# Altium PCB Remote_PCB.PcbDoc
Units mil, origin at the board's own origin, x right, y up, seen from the top; angles counter-clockwise.
Board outline 1045 x 1580 mil, 2 copper layers (Top Layer, Bottom Layer); 11 components, 10 nets, 40 pads, 0 vias.
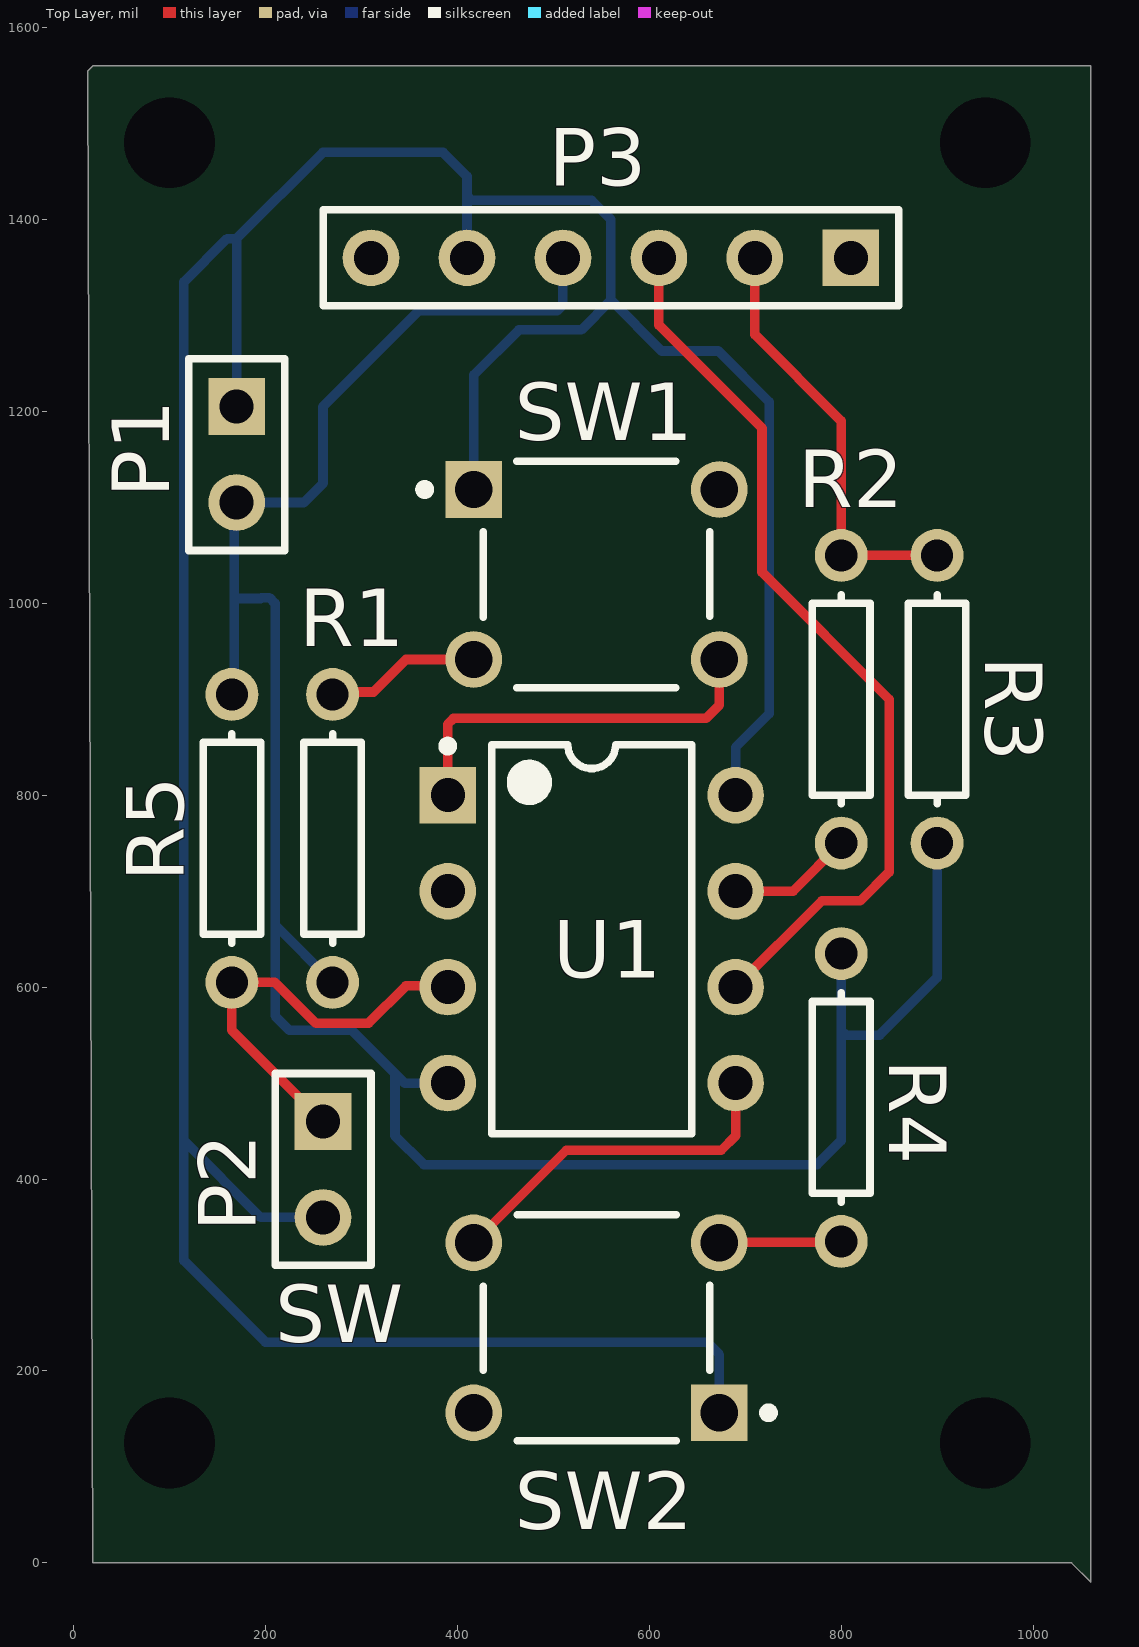
[diagram p0: Top Layer view]
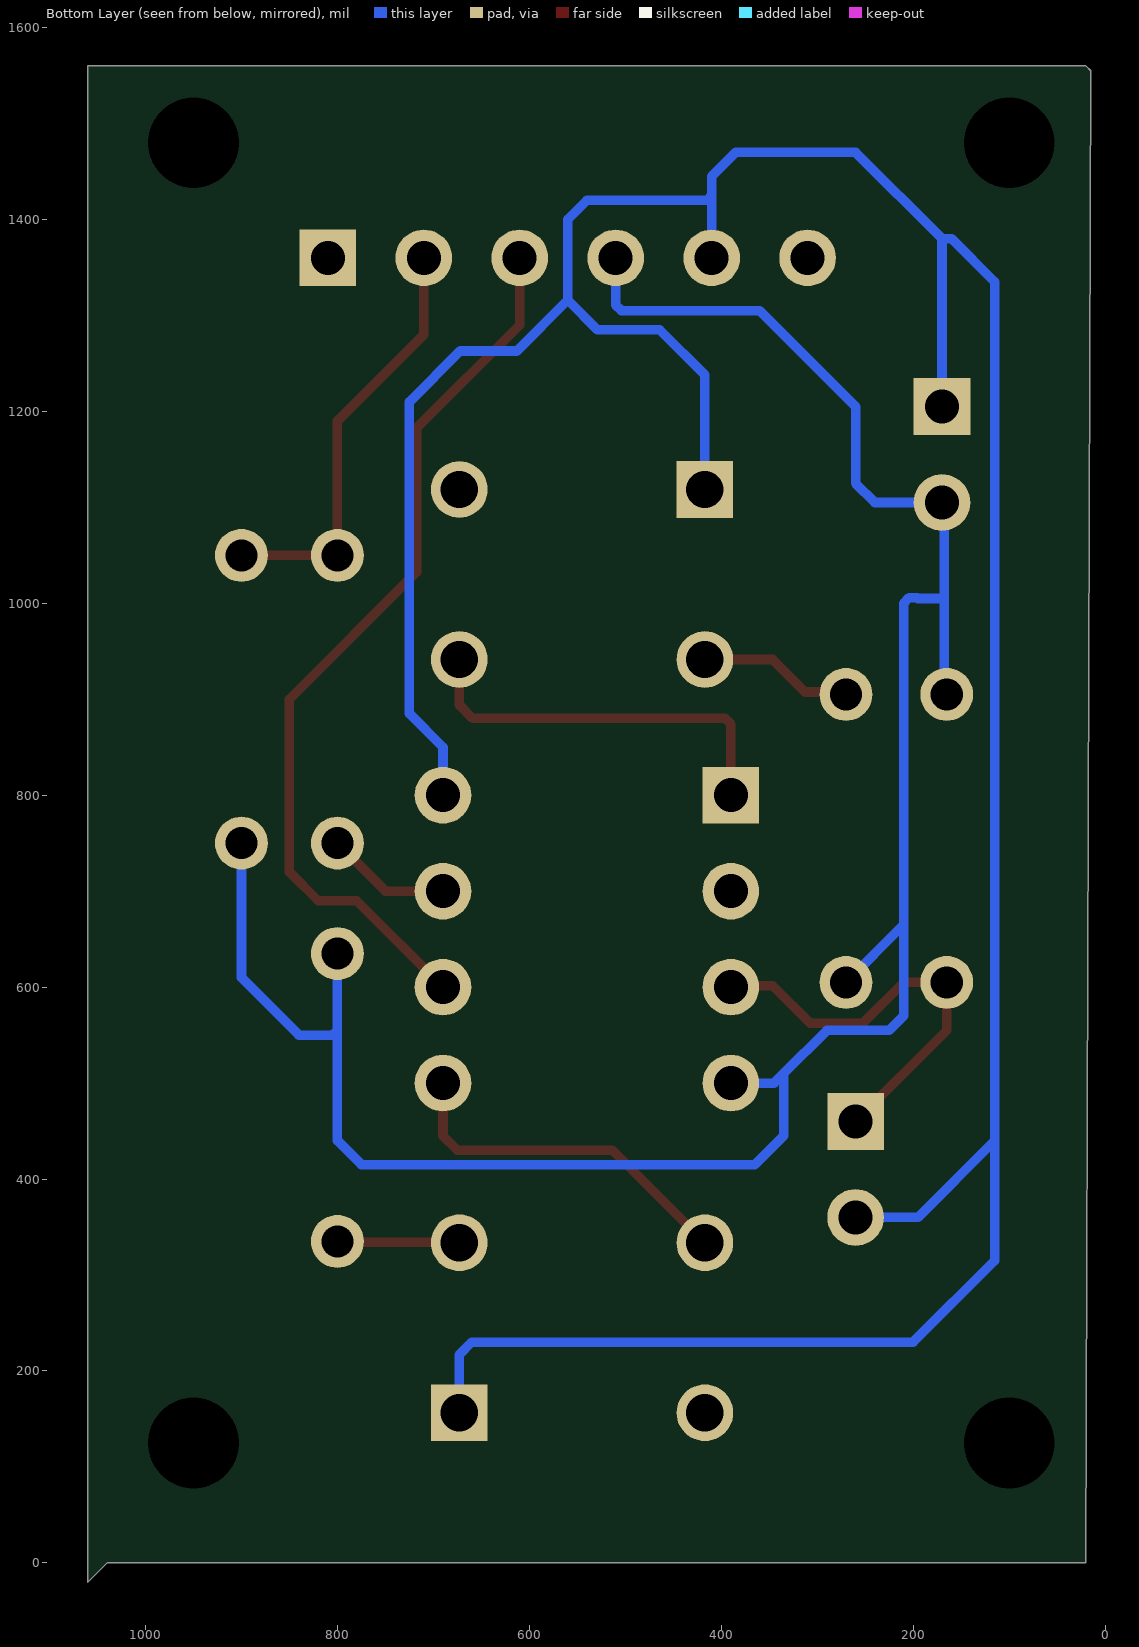
[diagram p1: Bottom Layer view, seen from below]

## Layer stack, top to bottom
Top Solder: solder mask 0.4, Solder Resist, Dk 3.5
Top Layer: signal copper 1.4
Dielectric 1: dielectric 12.6, FR-4, Dk 4.8
Bottom Layer: signal copper 1.4
Bottom Solder: solder mask 0.4, Solder Resist, Dk 3.5

## Board outline
15,1555 20,1560 1060,1560 1060,-20 1040,0 20,0

## Design rules (kind name [scope] priority, off if disabled: settings)
Clearance [All] p1: gap=10 ignorepadtopadclearanceinfootprint=FALSE except(0: Arc-Hole Track-Hole SMDPad-Hole THPad-Hole Via-Hole Fill-Hole Poly-Hole Region-Hole Text-Hole)
PolygonConnect [All] p1: connectstyle=Relief reliefconductorwidth=10 reliefentries=4 polygonreliefangle="90 Angle" airgapwidth=10
RoutingVias [All] p1: holewidth=28 width=50 viastyle="Through Hole" minholewidth=28 minwidth=50 maxholewidth=28 maxwidth=50
SolderMaskExpansion [All] p1: expansion=4 istentingtop=FALSE
Width [All] p1: maxlimit=10 minlimit=10 preferedwidth=10
30 further rules are at their usual default settings.

## Components (designator, comment, footprint, x,y, rotation, side; value= is the part's Value field where it differs from the comment)
P1 "Header 2" HDR1X2 170,1205 r270 top
P2 "Header 2" HDR1X2 260,460 r270 top
P3 "Header 6" HDR1X6 810,1360 r180 top
R1 "Res1" AXIAL-0.3 270,755 r270 top value=1K
R2 "Res1" AXIAL-0.3 800,900 r90 top value=1K
R3 "Res1" AXIAL-0.3 900,900 r270 top value=2K
R4 "Res1" AXIAL-0.3 800,485 r90 top value=1K
R5 "Res1" AXIAL-0.3 165,755 r270 top value=1K
SW1 "1825910-6" TECO-1825910-6_V 545,1030 r0 top locked
SW2 "1825910-6" TECO-1825910-6_V 545,245 r180 top locked
U1 "ATtiny85V-10PU" 8P3 540,650 r0 top locked

## Footprints (in the part's own frame and the unit in brackets; to place one, negate y for a bottom-side part, rotate by r counter-clockwise, add the part's x,y. Pads: shape width x height; smd on the part's side, far side on the other; paste and mask are expansions set on the pad)
8P3 [mm] "DIP, 8-Pin, Row Spacing 7.62 mm, Pitch 2.54 mm"
  rect 1.5x1.5 hole 0.9: 1(-3.81,3.81)
  round 1.5 hole 0.9: 2(-3.81,1.27) 3(-3.81,-1.27) 4(-3.81,-3.81) 5(3.81,-3.81) 6(3.81,-1.27) 7(3.81,1.27) 8(3.81,3.81)
  silkscreen extent -3.93,-5.15 2.65,5.23, body extent -3.6,-5.15 3.6,5.15, height 5.33
AXIAL-0.3 [mm] "Axial Device, Thru-Hole; 2 Leads; 0.3 in Pin Spacing"
  round 1.4 hole 0.85: 1(-3.81,0) 2(3.81,0)
  silkscreen extent -2.77,-0.76 2.77,0.76
HDR1X2 [mm] "Connector; Header; 2 Position"
  rect 1.5x1.5 hole 0.9: 1(0,0)
  round 1.5 hole 0.9: 2(2.54,0)
  silkscreen extent -1.27,-1.27 3.81,1.27
HDR1X6 [mm] "Connector; Header; 6 Position"
  rect 1.5x1.5 hole 0.9: 1(0,0)
  round 1.5 hole 0.9: 2(2.54,0) 3(5.08,0) 4(7.62,0) 5(10.16,0) 6(12.7,0)
  silkscreen extent -1.27,-1.27 13.97,1.27
TECO-1825910-6_V [mm] "Switch, 4-Leads, Body 5.99x5.99mm"
  rect 1.5x1.5 hole 0.99: 1(-3.25,2.25)
  round 1.5 hole 0.99: 2(3.25,2.25) 3(-3.25,-2.25) 4(3.25,-2.25)
  silkscreen extent -4.67,-2.99 2.99,3, body extent -3,-2.99 2.99,3, height 5

## Part data
P1 P2: "Header, 2-Pin", LatestRevisionDate=17-Jul-2002, LatestRevisionNote="Re-released for DXP Platform.", Publisher="Altium Limited"
P3: "Header, 6-Pin", LatestRevisionDate=17-Jul-2002, LatestRevisionNote="Re-released for DXP Platform.", Publisher="Altium Limited"
R1 R2 R3 R4 R5: "Resistor", LatestRevisionDate=17-Jul-2002, LatestRevisionNote="Re-released for DXP Platform.", PackageDescription="Axial Device, Thru-Hole; 2 Leads; 0.3 in Pin Spacing", PackageReference=AXIAL-0.3, Published=8-Jun-2000, Publisher="Altium Limited"
SW1 SW2: library part CMP-1684-00021-1, "Tact Switch, SPST-NO, 0.05 A, -35 to 85 degC, 4-Pin THD, RoHS, Bulk", Actuator Color=Black, Contact Rating @ Voltage=0.05A@24VDC, Dielectric Strength=500VAC, Manufacturer="TE Connectivity", Maximum AC Voltage Rating=N/A, Maximum Contact Resistance=100mOhm, Maximum DC Voltage Rating=24V, Minimum Insulation Resistance=100MOhm, Operating Temperature=-35to85C, Package Description="4-Pin Through Hole Device, Body 5.99 x 5.99 mm, Pitch 6.5 mm", Package Reference=THD, Actuator Length=1.4mm, Actuator Material=PolybutyleneTerephthalate, Actuator Style=RoundButton, Base Material=N/A, Body Orientation=Straight, Bushing Type=Unthreaded, Contact Material=CopperAlloy, Contact Plating=Silver, Datasheet URL=http://www.te.com/commerce/DocumentDelivery/DDEController?Action=showdoc&DocId=Customer+Drawing%7F1825910%7FC9%7Fpdf%7FEnglish%7FENG_CD_1825910_C9.pdf%7F1825910-6, Datasheet Version="Rev. C9", Dimension=5.99x5mm, Electrical Life=100000Cycles, Family=1825910, Function=MomentaryContact, Housing Material=N/A, Illumination=N/R, Manufacturer URL=http://www.te.com, Mechanical Life=100000Cycles, Mounting=ThroughHole, Packaging=N/A, Part No=1825910-6, Pole Throw Configuration=SPST, Product Weight=N/A, RoHS=Yes, Seal Description=N/A, Seal Location=N/A, Switch Configuration=OFF(ON), Terminal Type=PCPins, Thread Size=N/R
U1: library part CMP-0093-00033-2, "8-bit AVR Microcontroller, 10MHz, 1.8-5.5V, 8K Flash, 512 Bytes EEPROM, 512 Bytes SRAM, Industrial Grade (-40°C to 85°C), 8-Lead PDIP, Pb-Free", Code_JEDEC=MS-001-BA, ComponentLink1Description="Manufacturer URL", ComponentLink1URL=http://www.atmel.com/, ComponentLink2Description="ATtiny25/45/85 Datasheet", ComponentLink2URL=http://www.atmel.com/dyn/resources/prod_documents/doc2586.pdf, ComponentLink3Description="ATtiny25/45/85 Summary", ComponentLink3URL=http://www.atmel.com/dyn/resources/prod_documents/2586S.pdf, DatasheetVersion="revN, Apr-2011", PackageDescription="8-Lead, 0.300\" Wide Body, Plastic Dual In-Line Package (PDIP)", PackageReference=8P3, PackageVersion="revB, Jan-2002", RevisionNote="DatasheetVersion updated. URLs added."

## Free pads (board coordinates)
  round 60 hole 94.49: 32(100,1480) 33(100,125) 34(950,125) 35(950,1480)

## Nets (pads, with @x,y where several pads share a name; then routed paths per layer and width w, separated by ;. In a path a pad name is that pad's centre, name@x,y a point inside that pad or via, vN(x,y) a via of type N, cw(c..) or ccw(c..) an arc to the next point about the centre after c; other vN are vias at no path point)
+5: P1.1 P2.2 P3.5 SW1.1 SW2.1 U1.8 | length 3651
  Bottom Layer w10: P1.1 170,1380 ; P2.2 195,360 115,440 ; P3.5 410,1425 ; SW1.1 417.05,1237.95 464.09,1285 529.14,1285 560,1315.86 ; SW2.1 672.95,217.05 660,230 200,230 115,315 115,440 ; U1.8 690,850 725,885 725,1210 672.07,1262.93 612.93,1262.93 560,1315.86 ; 115,440 115,1335 160,1380 170,1380 ; 170,1380 260,1470 385,1470 410,1445 410,1425 ; 410,1425 415,1420 540,1420 560,1400 560,1315.86
GND: P1.2 P3.4 R1.2 R3.2 R4.2 R5.1 U1.4 | length 2507.2
  Bottom Layer w10: R5.1 167.5,907.5 167.5,1005 ; R1.2 210,665 ; U1.4 345,500 335,510 ; P3.4 510,1310.86 504.14,1305 360,1305 260,1205 260,1125 240,1105 P1.2 167.5,1102.5 167.5,1005 ; R4.2 800,555 ; R3.2 900,610 840,550 805,550 800,555 ; 167.5,1005 195,1005 195.86,1005.86 204.14,1005.86 210,1000 210,665 ; 210,665 210,570 225,555 290,555 335,510 ; 335,510 335,445 365,415 775,415 800,440 800,550 800,555
NetP2_1: P2.1 R5.2 U1.3 | length 443.6
  Top Layer w10: P2.1 165,555 R5.2 209.81,605 252.37,562.44 307.44,562.44 346.33,601.33 388.67,601.33 U1.3
NetP3_2: P3.2 R2.2 R3.1 | length 447.3
  Top Layer w10: P3.2 710,1280 800,1190 R2.2 R3.1
NetP3_3: P3.3 U1.6 | length 949.1
  Top Layer w10: P3.3 610,1290 717.48,1182.52 717.48,1032.52 850,900 850,720 820,690 780,690 U1.6
NetR1_1: R1.1 SW1.3 | length 162.1
  Top Layer w10: R1.1 272.56,907.56 312.56,907.56 346.42,941.42 SW1.3
NetR2_1: R2.1 U1.7 | length 130.7
  Top Layer w10: U1.7 750,700 R2.1
NetR4_1: R4.1 SW2.3 | length 127.6
  Top Layer w10: SW2.3 673.66,334.29 799.29,334.29 R4.1
NetSW1_4: SW1.4 U1.1 | length 412.8
  Top Layer w10: U1.1 390,874.14 395.86,880 659.14,880 672.95,893.81 SW1.4
NetSW2_4: SW2.4 U1.5 | length 374.1
  Top Layer w10: SW2.4 513.46,430 675,430 690,445 U1.5
pads on no net: P3.1 P3.6 SW1.2 SW2.2 U1.2

## Silkscreen, mask and mechanical layers (free items; w line width, h text height)
Top Overlay:
  text "SW" at 210,230 h60